# EAGLE board smart-bike-light (EAGLE 7.3.0)
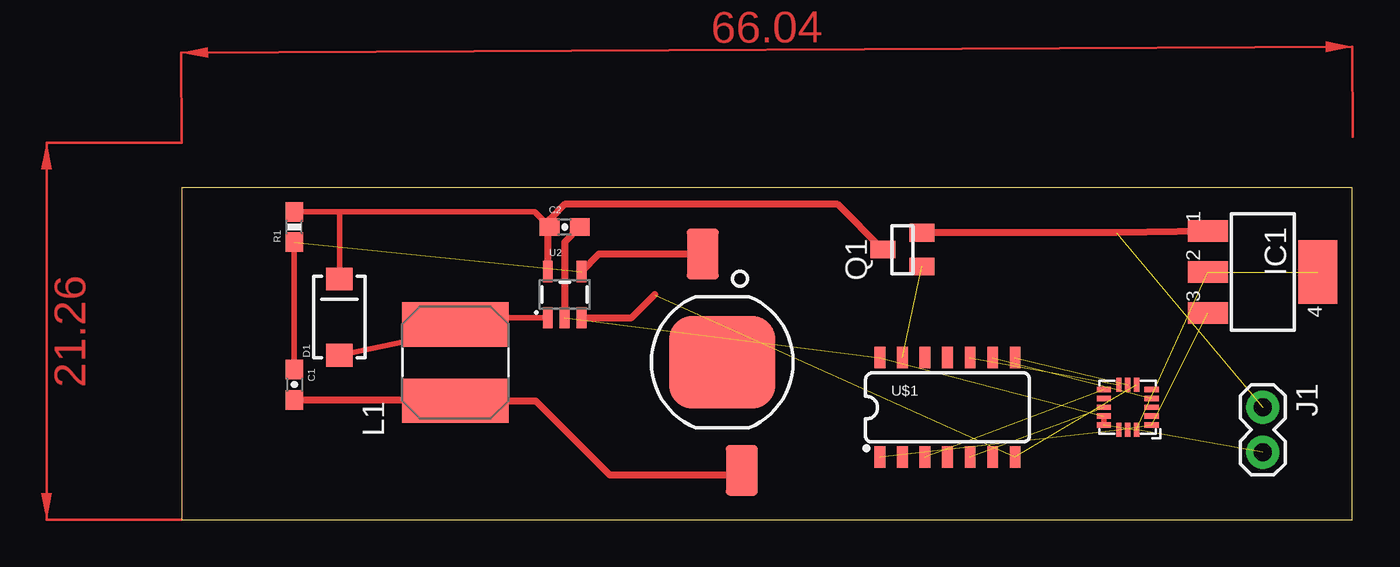
[diagram p0: board, top side]

Size 66.02 x 18.72 mm. Coordinates in mm from the lower left corner, seen from the top.
Outline: 0,0 66.02,0 66.02,18.72 0,18.72 0,0
Copper layers (1*16): Top 0.035mm / dielectric 1.5mm / Bottom 0.035mm
Design rules "default": minimum track width 10mil, minimum drill 24mil, track to track 8mil, track to pad 8mil, pad to pad 8mil, via to via 8mil, smd to smd 8mil, copper to edge 40mil, drill to drill 8mil, minimum pad ring 10mil, minimum via ring 8mil, stop-mask expansion 4mil, vias tented up to drill 0mil, thermal gap 10mil

## Footprints (pad centres in the part's own frame; a part is rotated, then mirrored left to right if it is on the bottom)
0603-CAP = smd 1.1 x 1: 1 -0.85,0; 2 0.85,0
SMA-DIODE = smd 1.27 x 1.47: A -2.15,0; C 2.15,0
SOT223 = smd 1.219 x 2.235: 1 -2.311,-3.099; 2 0,-3.099; 3 2.311,-3.099 | smd 3.6 x 2.2: 4 0,3.099
1X02 = drill 1.016 pad 1.88: 1 0,0; 2 2.54,0
SRN6045 = smd 2.5 x 6: 1 -2.175,-0.175; 2 2.125,-0.175
SUPER-SOT3 = smd 1 x 1.4: 1 -0.95,-1.1; 2 0.95,-1.1; 3 0,1.1
0603-RES = smd 1.1 x 1: 1 -0.85,0; 2 0.85,0
ADXL362 = smd 0.8 x 0.3: P$1 -1.35,1; P$2 -1.35,0.5; P$3 -1.35,0; P$4 -1.35,-0.5; P$5 -1.35,-1; P$9 1.35,-1; P$10 1.35,-0.5; P$11 1.35,0; P$12 1.35,0.5; P$13 1.35,1 | smd 0.3 x 0.8: P$6 -0.5,-1.275; P$7 0,-1.275; P$8 0.5,-1.275; P$14 0.5,1.275; P$15 0,1.275; P$16 -0.5,1.275
SOT23-5 = smd 0.55 x 1.2: 1 -0.95,-1.3; 2 0,-1.3; 3 0.95,-1.3; 4 0.95,1.3; 5 -0.95,1.3
SO14 = smd 0.6 x 1.2: 1 -3.81,-2.8; 2 -2.54,-2.8; 3 -1.27,-2.8; 4 0,-2.8; 5 1.27,-2.8; 6 2.54,-2.8; 7 3.81,-2.8; 8 3.81,2.8; 9 2.54,2.8; 10 1.27,2.8; 11 0,2.8; 12 -1.27,2.8; 13 -2.54,2.8; 14 -3.81,2.8
LUXEON = smd 2.85 x 1.8: A -6.1,-1.1; C 6.1,1.1 | smd 5.2 x 6: S 0,0

## Placement (x,y rotation side)
C1  1uF  [0603-CAP]  6.35,7.62 270 top
C2  2.2uF  [0603-CAP]  21.59,16.51 0 top
D1  MBRA140  [SMA-DIODE]  8.89,11.43 90 top
IC1  LM2936MP-3.3  [SOT223]  60.96,13.97 270 top
J1  [1X02]  60.96,6.35 270 top
L1  33uH  [SRN6045]  15.24,8.89 90 top
Q1  FDN360P  [SUPER-SOT3]  40.64,15.24 90 top
R1  0.3R  [0603-RES]  6.35,16.51 90 top
U1  ADXL362  [ADXL362]  53.34,6.35 180 top
U2  AL8805WS  [SOT23-5]  21.59,12.7 0 top
U$1  ATTINY84  [SO14]  43.18,6.35 0 top
U$2  LUXEONSMD  [LUXEON]  30.48,8.89 270 top

## Library data of the parts
C1 C2 = SparkFun-Capacitors
D1 = SparkFun-DiscreteSemi; PROD_ID: DIO-08053
IC1 = national-semiconductor; MF: NATIONAL SEMICONDUCTOR; MPN: LM2936MP-3.3/NOPB; OC_FARNELL: 1469062; OC_NEWARK: 41K4523
J1 = SparkFun-Connectors
L1 = SparkFun-Passives; PROD_ID: NDUC-11627
Q1 = transistor-power
R1 = SparkFun-Resistors
U1 = SparkFun-Sensors; PROD_ID: IC-11297
U2 = SparkFun-PowerIC; PROD_ID: IC-11626
U$1 = SparkFun-DigitalIC; PROD_ID: IC-11285
U$2 = SparkFun-LED

## Nets
3V3: IC1.3 U1.P$1 U1.P$14 U$1.1
BRI_CTRL: U1.P$6 U2.3 U$1.7
GND: C2.2 IC1.2 IC1.4 J1.2 U1.P$12 U1.P$13 U1.P$16 U2.2 U$1.14
INT1: U1.P$11 U$1.5
INT2: U1.P$9 U$1.3
LED_EN: Q1.1 U$1.13
N$1: C1.1 R1.1 U2.4 U$2.A
N$2: C2.1 D1.C Q1.3 R1.2 U2.5
N$3: D1.A L1.2 U2.1
N$4: C1.2 L1.1 U$2.C
N$5: U1.P$7 U$1.8
N$6: U1.P$4 U$1.9
N$7: U1.P$8 U$1.10
VIN: IC1.1 J1.1 Q1.2

## Tracks (layer width: path | path; a pad name or v marks a point on that pad's centre or on a via)
3V3  (3 unrouted)
BRI_CTRL  (2 unrouted)
  Top 0.406: U2.3 25.37,11.4 26.67,12.7
GND  (6 unrouted)
  Top 0.305: U1.P$12 U1.P$13
  Top 0.406: C2.2 21.59,15.66 U2.2
INT1  (1 unrouted)
INT2  (1 unrouted)
LED_EN  (1 unrouted)
N$1  (1 unrouted)
  Top 0.305: R1.1 C1.1
  Top 0.406: U2.4 23.53,14.99 U$2.A
N$2
  Top 0.305: R1.2 8.89,17.36 | 8.89,17.36 19.89,17.36 C2.1 | D1.C 8.89,17.36
  Top 0.406: Q1.3 37,17.78 21.59,17.78 20.74,16.93 C2.1 20.64,16.41 U2.5
N$3
  Top 0.305: U2.1 15.8,11.4 L1.2 14.95,10.55 D1.A
N$4
  Top 0.406: C1.2 15.36,6.77 L1.1 19.95,6.71 24.13,2.54 31.33,2.54 U$2.C
N$5  (1 unrouted)
N$6  (1 unrouted)
N$7  (1 unrouted)
VIN  (1 unrouted)
  Top 0.406: IC1.1 52.69,16.19 Q1.2
(copper drawn outside any net)
  shapes: Top area x2